# EAGLE board accBoard (EAGLE 6.1)
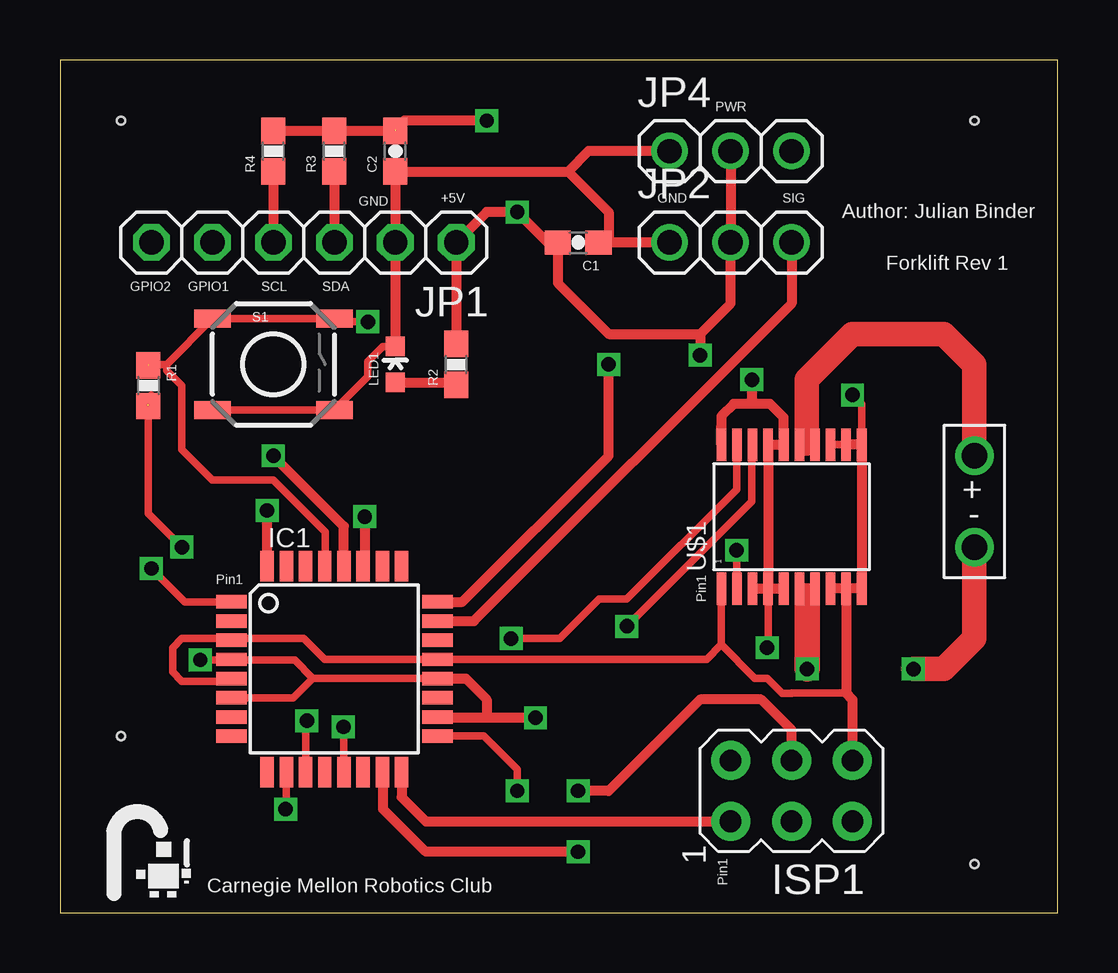
[diagram p0: board, top side]
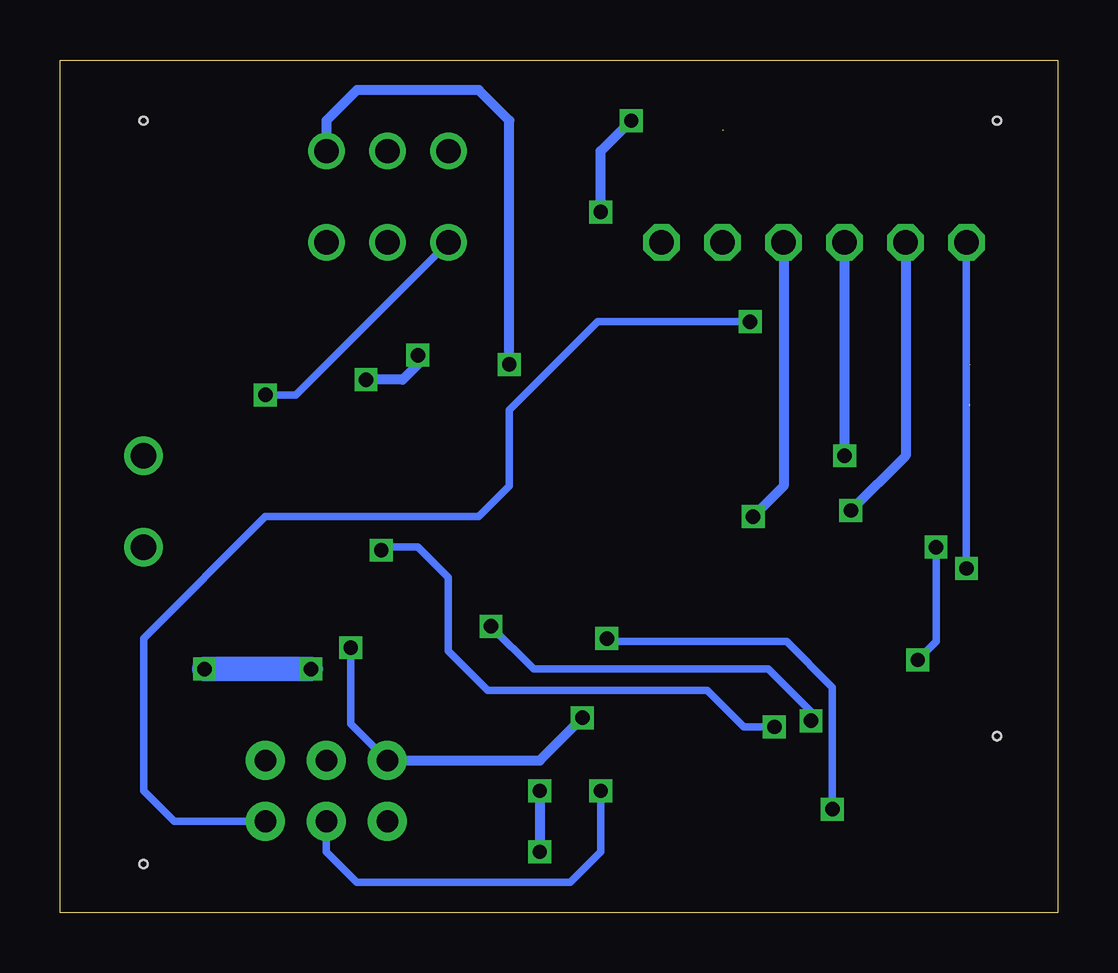
[diagram p1: board, bottom side, seen from below]

Size 41.58 x 35.55 mm. Coordinates in mm from the lower left corner, seen from the top.
Outline: 0,0 41.58,0 41.58,35.55 0,35.55 0,0
Copper layers (1*16): Top 0.0356mm / dielectric 1.5011mm / Bottom 0.0356mm
Design rules: minimum track width 6mil, minimum drill 13mil, track to track 6mil, track to pad 6mil, pad to pad 6mil, via to via 6mil, smd to smd 6mil, copper to edge 15mil, drill to drill 6mil, minimum pad ring 7mil, minimum via ring 7mil, stop-mask expansion 4mil, vias tented up to drill 0mil, thermal gap 10mil
Holes 0.33 mm at 2.54,33.02 38.1,2.03 38.1,33.02 2.54,7.37

## Footprints (pad centres in the part's own frame; a part is rotated, then mirrored left to right if it is on the bottom)
0603-CAP = smd 1.1 x 1: 1 -0.85,0; 2 0.85,0
TQFP32-08 = smd 1.27 x 0.559: 1 -4.293,2.8; 2 -4.293,2; 3 -4.293,1.2; 4 -4.293,0.4; 5 -4.293,-0.4; 6 -4.293,-1.2; 7 -4.293,-2; 8 -4.293,-2.8; 17 4.293,-2.8; 18 4.293,-2; 19 4.293,-1.2; 20 4.293,-0.4; 21 4.293,0.4; 22 4.293,1.2; 23 4.293,2; 24 4.293,2.8 | smd 0.559 x 1.27: 9 -2.8,-4.293; 10 -2,-4.293; 11 -1.2,-4.293; 12 -0.4,-4.293; 13 0.4,-4.293; 14 1.2,-4.293; 15 2,-4.293; 16 2.8,-4.293; 25 2.8,4.293; 26 2,4.293; 27 1.2,4.293; 28 0.4,4.293; 29 -0.4,4.293; 30 -1.2,4.293; 31 -2,4.293; 32 -2.8,4.293
AVRISP = drill 0.9 pad 1.626: 1 -1.27,2.54; 2 1.27,2.54; 3 -1.27,0; 4 1.27,0; 5 -1.27,-2.54; 6 1.27,-2.54
1X06 = drill 1.016 octagon: 1 -6.35,0; 2 -3.81,0; 3 -1.27,0; 4 1.27,0; 5 3.81,0; 6 6.35,0
1X03 = drill 1.016: 1 -2.54,0; 2 0,0; 3 2.54,0
1X02_BIG = drill 1.067: P$1 0,0; P$2 3.81,0
LED-0603 = smd 0.8 x 0.8: A 0,-0.75; C 0,0.75
0603-RES = smd 1.1 x 1: 1 -0.85,0; 2 0.85,0
TACTILE_SWITCH_SMD = smd 1.524 x 0.762: 1 -2.54,1.905; 2 2.54,1.905; 3 -2.54,-1.905; 4 2.54,-1.905
SSOP20 = smd 1.35 x 0.4: 1 -3,2.925; 2 -3,2.275; 3 -3,1.625; 4 -3,0.975; 5 -3,0.325; 6 -3,-0.325; 7 -3,-0.975; 8 -3,-1.625; 9 -3,-2.275; 10 -3,-2.925; 11 3,-2.925; 12 3,-2.275; 13 3,-1.625; 14 3,-0.975; 15 3,-0.325; 16 3,0.325; 17 3,0.975; 18 3,1.625; 19 3,2.275; 20 3,2.925

## Placement (x,y rotation side)
C1  0.1uF  [0603-CAP]  21.59,27.94 180 top
C2  0.1uf  [0603-CAP]  13.97,31.75 90 top
IC1  MEGA168  [TQFP32-08]  11.43,10.16 0 top
ISP1  AVRISP-6  [AVRISP]  30.48,5.08 90 top
JP1  [1X06]  10.16,27.94 180 top
JP2  [1X03]  27.94,27.94 0 top
JP3  [1X02_BIG]  38.1,15.24 90 top
JP4  [1X03]  27.94,31.75 0 top
LED1  GREENLED  [LED-0603]  13.97,22.86 0 top
R1  10K  [0603-RES]  3.68,21.97 270 top
R2  330  [0603-RES]  16.51,22.86 90 top
R3  10K  [0603-RES]  11.43,31.75 90 top
R4  10K  [0603-RES]  8.89,31.75 90 top
S1  [TACTILE_SWITCH_SMD]  8.89,22.86 0 top
U$1  TB6593FNG  [SSOP20]  30.48,16.51 90 top

## Library data of the parts
C1 C2 JP3 LED1 R1-R4 S1 = SparkFun
IC1 = atmel; MPN: ATMEGA8-16AU; OC_FARNELL: 9171371; OC_NEWARK: 73M8863
ISP1 JP1 JP2 JP4 = adafruit
U$1 = jabinder

## Nets
AVR_MISO: IC1.16 ISP1.1
AVR_MOSI: IC1.15 ISP1.4
AVR_RST: IC1.29 ISP1.5 R1.1 S1.1 S1.2
AVR_SCK: IC1.17 ISP1.3
EXTRA_SIG: IC1.24 JP4.3
GND: C1.1 C2.1 IC1.3 IC1.5 IC1.21 ISP1.6 JP1.2 JP2.1 JP4.1 LED1.C S1.3 S1.4 U$1.1 U$1.8 U$1.9 U$1.10 U$1.11 U$1.12 U$1.13
GPIO1: IC1.32 JP1.5
GPIO2: IC1.1 JP1.6
IN1: IC1.11 U$1.18
IN2: IC1.10 U$1.19
N$2: LED1.A R2.1
O1: JP3.P$1 U$1.6 U$1.7
O2: JP3.P$2 U$1.14 U$1.15
POT_SIG: IC1.23 JP2.3
PWM: IC1.13 U$1.2
SCL: IC1.28 JP1.4 R4.1
SDA: IC1.27 JP1.3 R3.1
VCC: C1.2 C2.2 IC1.4 IC1.6 IC1.18 IC1.20 ISP1.2 JP1.1 JP2.2 JP4.2 R1.2 R2.2 R3.2 R4.2 U$1.3 U$1.4 U$1.5 U$1.16 U$1.17 U$1.20

## Tracks (layer width: path | path; a pad name or v marks a point on that pad's centre or on a via)
AVR_MISO
  Top 0.406: IC1.16 14.23,4.82 15.24,3.81 ISP1.1
AVR_MOSI  (via drill 0.6)
  Top 0.406: ISP1.4 30.48,7.62 29.21,8.89 26.67,8.89 22.86,5.08 v21.59,5.08 | v21.59,2.54 15.24,2.54 13.46,4.32 13.46,5.83 IC1.15
  Bottom 0.406: v21.59,5.08 v21.59,2.54
AVR_RST  (via drill 0.6)  (1 unrouted)
  Top 0.305: 4.45,22.86 S1.1 S1.2 11.56,24.64 v12.83,24.64 | 4.45,22.86 3.68,22.86 | IC1.29 11.05,14.47 11.05,15.88 8.89,18.03 6.35,18.03 5.08,19.3 5.08,21.97 4.45,22.61 4.45,22.86
  Bottom 0.305: v12.83,24.64 19.18,24.64 22.86,20.96 22.86,17.78 24.13,16.51 33.02,16.51 38.1,11.43 38.1,5.08 36.83,3.81 ISP1.5
AVR_SCK  (via drill 0.6)
  Top 0.305: IC1.17 17.65,7.37 19.05,5.97 v19.05,5.08
  Bottom 0.305: v19.05,5.08 19.05,2.54 20.32,1.27 29.21,1.27 30.48,2.54 ISP1.3
EXTRA_SIG  (via drill 0.6)
  Top 0.406: IC1.24 16.77,12.96 22.86,19.05 v22.86,22.86
  Bottom 0.406: v22.86,22.86 22.86,33.02 24.13,34.29 29.21,34.29 30.48,33.02 JP4.3
GND  (via drill 0.6)
  Top 0.305: v33.02,21.59 33.41,21.21 U$1.11 | U$1.13 U$1.12 | U$1.1 27.56,11.18 | 27.56,11.18 28.96,9.78 29.46,9.78 30.1,9.14 30.48,9.14 30.49,9.16 32.75,9.16 | 27.56,11.18 26.94,10.56 IC1.21 11.03,10.56 10.16,11.43 7.21,11.43 IC1.3 7.07,11.43 5.08,11.43 4.7,11.05 4.7,10.03 5.08,9.65 5.21,9.65 7.03,9.65 IC1.5 | S1.3 S1.4 12.83,22.35 12.83,22.99 13.45,23.61 LED1.C
  Top 0.406: 21.17,30.9 C2.1 JP1.2 LED1.C | 21.17,30.9 22.86,29.21 22.86,27.94 | JP2.1 22.86,27.94 | 22.86,27.94 C1.1 | U$1.12 U$1.11 U$1.10 U$1.9 | U$1.9 U$1.8 | JP4.1 22.02,31.75 21.17,30.9 | U$1.9 32.75,9.16 33.02,8.89 ISP1.6
  Bottom 0.305: JP2.1 31.75,21.59 v33.02,21.59
GPIO1  (via drill 0.6)
  Top 0.406: IC1.32 v8.63,16.77
  Bottom 0.406: JP1.5 6.35,19.05 v8.63,16.77
GPIO2  (via drill 0.6)
  Top 0.305: IC1.1 5.21,12.95 v3.81,14.35
  Bottom 0.305: v3.81,14.35 JP1.6
IN1  (via drill 0.6)
  Top 0.305: U$1.18 28.83,19.48 28.83,17.14 v23.62,11.94 | v10.29,8 10.23,7.94 IC1.11
  Bottom 0.305: v23.62,11.94 21.84,10.16 12.07,10.16 10.29,8.38 v10.29,8
IN2  (via drill 0.6)
  Top 0.305: U$1.19 28.19,19.5 28.19,17.65 23.62,13.08 22.48,13.08 20.83,11.43 v18.8,11.43 | v9.4,4.32 9.43,4.35 IC1.10
  Bottom 0.305: v18.8,11.43 18.67,11.3 11.3,11.3 9.4,9.4 v9.4,4.32
N$2
  Top 0.406: LED1.A 16.41,22.11 R2.1
O1  (via drill 0.6)
  Top 0.305: U$1.6 31.11,13.51 31.13,12.95
  Top 0.406: U$1.7 U$1.6
  Top 1.016: JP3.P$1 38.1,11.43 36.83,10.16 v35.56,10.16
  Top 1.067: v31.13,10.16 31.13,12.95
  Bottom 1.016: v35.56,10.16 v31.13,10.16
O2
  Top 0.305: 31.11,19.56 31.16,19.51 U$1.14 U$1.15
  Top 1.016: JP3.P$2 38.1,22.86 36.83,24.13 33.02,24.13 31.11,22.23 31.11,19.56
POT_SIG
  Top 0.406: JP2.3 30.48,25.4 17.24,12.16 IC1.23
PWM  (via drill 0.6)
  Top 0.305: U$1.2 28.19,13.52 v28.19,15.11 | v11.81,7.75 11.83,7.73 IC1.13
  Bottom 0.305: v28.19,15.11 28.07,15.24 26.67,15.24 25.4,13.97 25.4,10.92 23.75,9.27 14.61,9.27 13.08,7.75 v11.81,7.75
SCL  (via drill 0.6)
  Top 0.406: R4.1 JP1.4 | IC1.28 11.83,16.11 v8.89,19.05
  Bottom 0.406: v8.89,19.05 JP1.4
SDA  (via drill 0.6)
  Top 0.406: R3.1 JP1.3 | v12.7,16.51 12.7,14.52 IC1.27
  Bottom 0.406: JP1.3 11.43,17.78 v12.7,16.51
VCC  (via drill 0.6)  (2 unrouted)
  Top 0.305: v29.46,11.05 29.5,11.09 U$1.4 | 10.54,9.78 10.56,9.76 IC1.20 | 10.54,9.78 9.78,10.54 7.16,10.54 IC1.4 7.12,10.54 v5.84,10.54 | 10.54,9.78 9.72,8.96 IC1.6 | v5.08,15.24 3.68,16.64 3.68,21.21 3.81,21.34 3.81,21.59
  Top 0.406: R4.2 R3.2 C2.2 | R2.2 JP1.1 17.78,29.21 v19.05,29.21 20.32,27.94 C1.2 20.74,26.25 22.86,24.13 26.67,24.13 | 26.67,24.13 27.94,25.4 JP2.2 JP4.2 | v17.78,33.02 14.35,33.02 13.97,32.64 | 28.7,21.21 29.59,21.21 30.15,20.64 U$1.16 U$1.17 U$1.4 | 28.7,21.21 28.07,21.21 27.56,20.7 27.56,20.32 | 27.56,20.32 27.56,20.19 | U$1.20 27.56,20.32 | U$1.3 U$1.4 | U$1.4 U$1.5 | 26.67,24.13 v26.67,23.24 | v28.83,22.23 28.83,21.34 28.7,21.21 | v19.81,8.13 17.78,8.13 | 17.78,8.13 15.75,8.13 IC1.18 | IC1.20 16.91,9.76 17.78,8.89 17.78,8.13
  Bottom 0.305: ISP1.2 29.46,7.87 v29.46,11.05 | v5.84,10.54 5.08,11.3 v5.08,15.24
  Bottom 0.406: v19.05,29.21 19.05,31.75 v17.78,33.02 | v26.67,23.24 26.67,22.86 27.31,22.23 v28.83,22.23 | ISP1.2 21.59,6.35 v19.81,8.13

## Text on the board
tPlace: PWR | GND | +5V | GND | SIG | Author: Julian Binder | Forklift Rev 1 | GPIO2 | GPIO1 | SCL | SDA | + | - | Pin1 | Pin1 | Pin1 | Carnegie Mellon Robotics Club
tDocu: AVR Reset